# Altium PCB Soldeer Station Final.PcbDoc
Units mm, origin at the board's own origin, x right, y up, seen from the top; angles counter-clockwise.
Board outline 97.79 x 129.54 mm, 2 copper layers (Top Layer, Bottom Layer); 81 components, 77 nets, 280 pads, 28 vias.
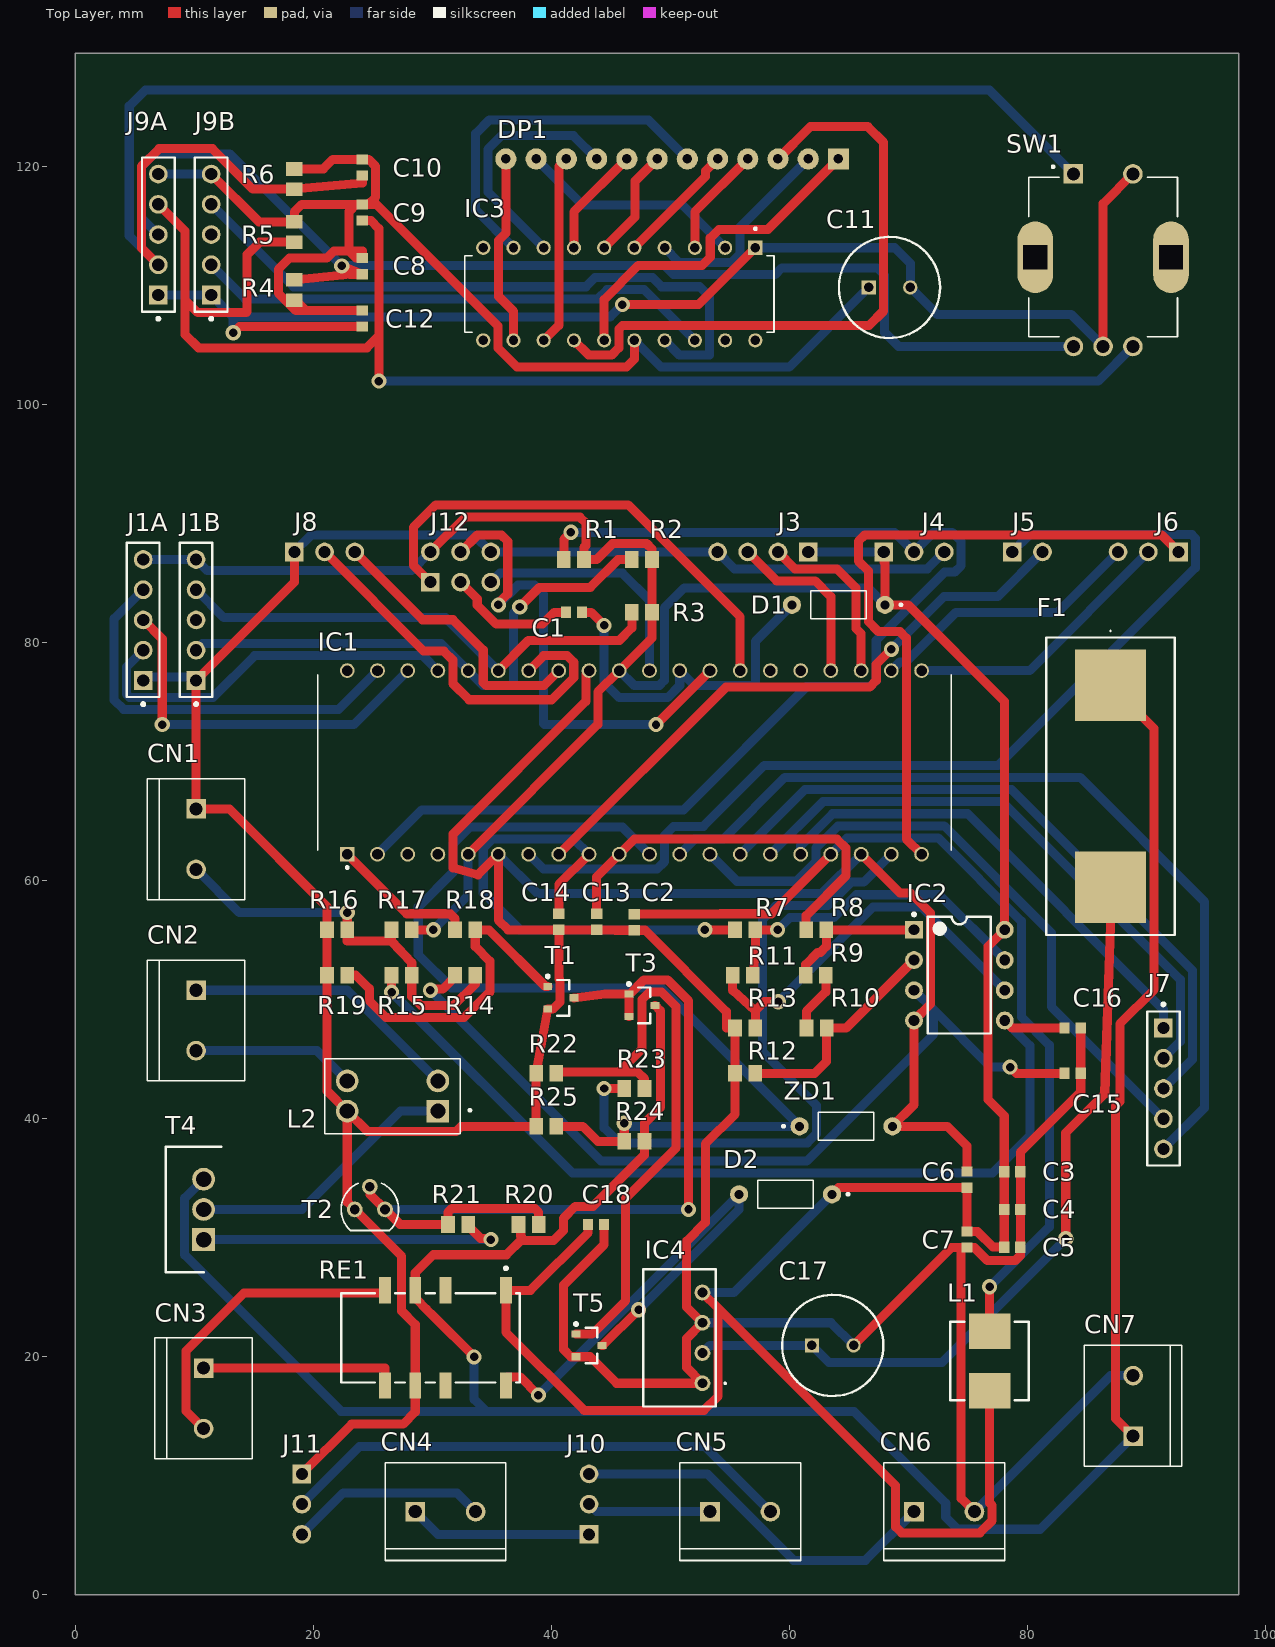
[diagram p0: Top Layer view]
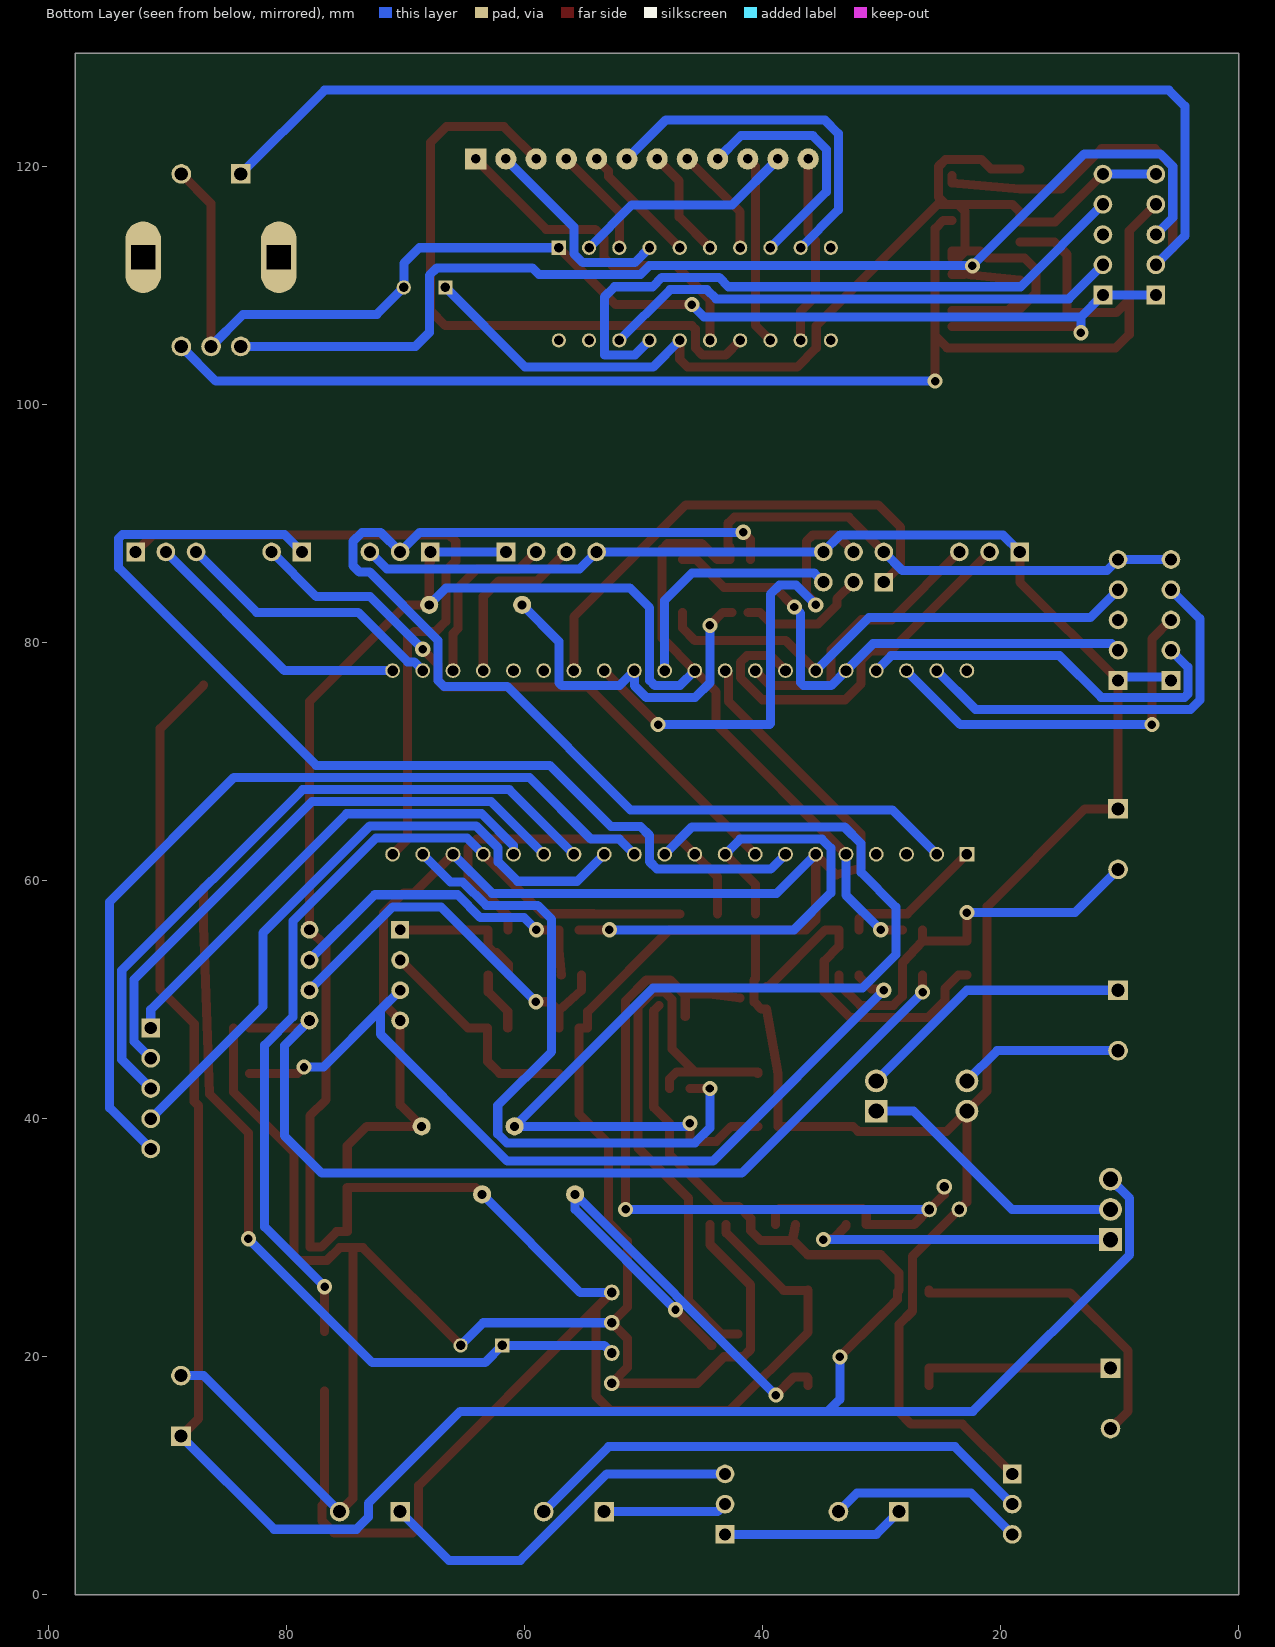
[diagram p1: Bottom Layer view, seen from below]

## Layer stack, top to bottom
Top Solder: solder mask 0.0102, Solder Resist, Dk 3.5
Top Layer: signal copper 0.0356
Dielectric 1: dielectric 0.32, FR-4, Dk 4.8
Bottom Layer: signal copper 0.0356
Bottom Solder: solder mask 0.0102, Solder Resist, Dk 3.5

## Board outline
0,0 97.79,0 97.79,129.54 0,129.54

## Design rules (kind name [scope] priority, off if disabled: settings)
Clearance [All] p1: gap=0.254 ignorepadtopadclearanceinfootprint=FALSE except(0: Arc-Hole Track-Hole SMDPad-Hole THPad-Hole Via-Hole Fill-Hole Poly-Hole Region-Hole Text-Hole)
HoleSize [All] p1: absolutevalues=TRUE maxlimit=2.921 minlimit=0.025 maxpercent=80.000 minpercent=20.000
PolygonConnect [All] p1: connectstyle=Relief reliefconductorwidth=0.254 reliefentries=4 polygonreliefangle="90 Angle" airgapwidth=0.254
RoutingVias [All] p1: holewidth=0.711 width=1.27 viastyle="Through Hole" minholewidth=0.711 minwidth=1.27 maxholewidth=0.711 maxwidth=1.27
SolderMaskExpansion [All] p1: expansion=0.102 istentingtop=FALSE
Width [All] p1: maxlimit=0.762 minlimit=0.254 preferedwidth=0.762 minimp=50.000000 maximp=50.000000 favimp=50.000000
29 further rules are at their usual default settings.

## Classes and differential pairs
component class Verwarmingselement: CN2 L2 R18 R19 R20 R21 T1 T2 T3 T4
component class Tempmeting: C13 C14 C15 C16 CN1 IC2 R7 R8 R9 R10 R11 R12 R13 R14 R15 R16 R17
component class "Soldeer Station": C1 C2 C3 C4 C5 C6 C7 D1 IC1 J1A J1B J3 J4 J5 J6 J7 J8 J12 L1 R1 R2 R3
component class Display: C8 C9 C10 C11 C12 DP1 IC3 J9A J9B R4 R5 R6 SW1
component class Batterij: C17 C18 CN3 CN4 CN5 CN6 CN7 D2 D? F1 IC4 J10 J11 R22 R23 R24 R25 RE1 T5 ZD1

## Components (designator, comment, footprint, x,y, rotation, side; value= is the part's Value field where it differs from the comment)
C1 "C0402C104K4RACTU" Capacitor 41.91,82.55 r0 top
C2 "C0402C104K4RACTU" Capacitor 46.99,56.515 r90 top
C3 "C0402C104K4RACTU" Capacitor 78.74,35.56 r180 top
C4 "C0402C104K4RACTU" Capacitor 78.74,32.385 r0 top
C5 "C0402C104K4RACTU" Capacitor 78.74,29.21 r0 top
C6 "10uf 50V" Capacitor 74.93,34.885 r270 top
C7 "10n" Capacitor 74.93,29.845 r90 top
C8 "C0402C104K4RACTU" Capacitor 24.13,111.64 r90 top
C9 "C0402C104K4RACTU" Capacitor 24.13,116.165 r90 top
C10 "C0402C104K4RACTU" Capacitor 24.13,119.935 r90 top
C11 "100uf 25v" "100uf 25v" 66.675,109.855 r0 top
C12 "C0402C104K4RACTU" Capacitor 24.13,107.235 r90 top
C13 "10n" Capacitor 43.815,56.555 r90 top
C14 "10n" Capacitor 40.64,56.555 r90 top
C15 "10n" Capacitor 83.82,43.815 r180 top
C16 "10n" Capacitor 83.82,47.625 r180 top
C17 "100uf 25v" "100uf 25v" 61.905,20.955 r0 top
C18 "C0402C104K4RACTU" Capacitor 43.775,31.115 r180 top
CN1 "" "K1,K2,K3,K8 Printkroonsteen" 10.16,63.5 r270 top
CN2 "" "K1,K2,K3,K8 Printkroonsteen" 10.16,48.26 r270 top
CN3 "K1,K2,K3,K8 Printkroonsteen" "K1,K2,K3,K8 Printkroonsteen" 10.795,16.51 r270 top
CN4 "Lader" "K1,K2,K3,K8 Printkroonsteen" 31.115,6.985 r0 top
CN5 "Batterij 20V 2Ah- 4Ah" "K1,K2,K3,K8 Printkroonsteen" 55.88,6.985 r0 top
CN6 "K1,K2,K3,K8 Printkroonsteen" "K1,K2,K3,K8 Printkroonsteen" 73.025,6.985 r0 top
CN7 "K1,K2,K3,K8 Printkroonsteen" "K1,K2,K3,K8 Printkroonsteen" 88.9,15.875 r90 top
D1 "1N4148" 1N4007 64.135,83.185 r180 top
D2 "1N4007" 1N4007 59.69,33.655 r180 top
DP1 "Display" DIP12 64.135,120.65 r180 top
F1 "" 65800201009 86.995,67.945 r270 top
IC1 "ATMEGA4809-PF" ATmega4809-PF 46.99,69.945 r90 top
IC2 "MCP6002-E/P" MCP6002 74.295,52.07 r0 top
IC3 "TM1637" TM1637 45.72,109.3 r270 top
IC4 "CRE1S2405SC" CRE1(SC) 53.835,21.59 r90 top
J1A "K9 5Pinheader" "K9 5Pinheader" 5.715,81.915 r90 top
J1B "K9 5Pinheader" "K9 5Pinheader" 10.16,81.915 r90 top
J3 "UART2" "K6 4Pinheader" 57.785,87.63 r180 top
J4 "K4,7,10 3Pinheader" "K4,7,10 3Pinheader" 70.485,87.63 r0 top
J5 "K5 2Pinheader" "K5 2Pinheader" 80.01,87.63 r0 top
J6 "" "K4,7,10 3Pinheader" 90.17,87.63 r180 top
J7 "K9 5Pinheader" "K9 5Pinheader" 91.44,42.545 r270 top
J8 "UART0" "K4,7,10 3Pinheader" 20.955,87.63 r0 top
J9A "K9 5Pinheader" "K9 5Pinheader" 6.985,114.3 r90 top
J9B "K9 5Pinheader" "K9 5Pinheader" 11.43,114.3 r90 top
J10 "K4,7,10 3Pinheader" "K4,7,10 3Pinheader" 43.18,7.62 r90 top
J11 "K4,7,10 3Pinheader" "K4,7,10 3Pinheader" 19.05,7.62 r270 top
J12 "K11 6Pinheader" "K11 6Pinheader" 29.845,85.09 r0 top
L1 "" Smoorspoel 76.835,19.645 r270 top
L2 "Spoel" CM2545x171B-10 26.67,41.91 r180 top
R1 "4k7" Resistor 41.91,86.995 r0 top (schematic designator R160)
R2 "4k7" Resistor 47.625,86.995 r0 top
R3 "4k7" Resistor 47.625,82.55 r0 top
R4 "10k" Resistor 18.415,109.64 r270 top
R5 "10k" Resistor 18.415,114.515 r90 top
R6 "10k" Resistor 18.415,118.96 r90 top
R7 "5k6" Resistor 56.3,55.88 r0 top
R8 "5k6" Resistor 62.269,55.88 r0 top
R9 "18K" Resistor 62.23,52.07 r0 top
R10 "18K" Resistor 62.294,47.625 r0 top
R11 "18k" Resistor 56.095,52.07 r180 top
R12 "100E" Resistor 56.3,43.815 r0 top
R13 "100Ω" Resistor 56.3,47.625 r0 top
R14 "5K6" Resistor 32.766,52.07 r0 top
R15 "5k6" Resistor 27.432,52.07 r0 top
R16 "10M" Resistor 22.01,55.88 r0 top
R17 "1M" Resistor 27.432,55.88 r0 top
R18 "10K" Resistor 32.766,55.88 r0 top
R19 "4k7" Resistor 22.01,52.07 r0 top
R20 "4k7" Resistor 38.1,31.115 r180 top
R21 "100Ω" Resistor 32.17,31.115 r0 top
R22 "4.7k" Resistor 39.585,43.815 r180 top
R23 "10k" Resistor 46.99,42.545 r180 top
R24 "6,8k" Resistor 46.99,38.1 r180 top
R25 "10k" Resistor 39.585,39.37 r180 top
RE1 "G6S-2F-DC5" G6S-2F-DC5 29.845,21.59 r180 top
SW1 "PEC11R-4225F-S0024" "PEC11 S1" 86.375,112.395 r0 top
T1 "BC847B" bc847b 40.81,50.165 r0 top
T2 "BC857C" BC557C 24.765,32.385 r0 top
T3 "BC847B" bc847b 47.625,49.53 r0 top
T4 "IRF9Z34NPBF" TO254P469X1042X1967-3P 10.795,29.845 r90 top
T5 "BC847B" BC847B 43.18,20.955 r0 top
ZD1 "5V1" 1N4007 64.77,39.37 r0 top

## Footprints (in the part's own frame and the unit in brackets; to place one, negate y for a bottom-side part, rotate by r counter-clockwise, add the part's x,y. Pads: shape width x height; smd on the part's side, far side on the other; paste and mask are expansions set on the pad)
1N4007 [mil]
  round 60 hole 30: 1(-153.72,0) 2(153.72,0)
  silkscreen extent -211,-46 91,46, body extent -216,-53 216,53, height 106
"100uf 25v" [mm]
  rect 1.2x1.2 hole 0.8: 1(0,0)
  round 1.2 hole 0.8: 2(3.5,0)
  silkscreen extent -2.5,-4.25 6,4.25, body extent -2.49,-4.25 6,4.25, height 13
65800201009 [mm]
  rect 6x6 smd: 1(-8.5,0) 2(8.5,0)
  silkscreen extent -13.1,-5.4 12.5,5.4, body extent -11.45,-4.8 11.45,4.8, height 12.1
ATmega4809-PF [mm]
  rect 1.24x1.24 hole 0.89: 1(-7.715,24.13)
  round 1.24 hole 0.89: 2(-7.715,21.59) 3(-7.715,19.05) 4(-7.715,16.51) 5(-7.715,13.97) 6(-7.715,11.43) 7(-7.715,8.89) 9(-7.715,3.81) 10(-7.715,1.27) 11(-7.715,-1.27) 12(-7.715,-3.81) 13(-7.715,-6.35) 14(-7.715,-8.89) 15(-7.715,-11.43) 16(-7.715,-13.97) 17(-7.715,-16.51) 18(-7.715,-19.05) 19(-7.715,-21.59) 20(-7.715,-24.13) 21(7.715,-24.13) 22(7.715,-21.59) 23(7.715,-19.05) 24(7.715,-16.51) 25(7.715,-13.97) 26(7.715,-11.43) 27(7.715,-8.89) 28(7.715,-6.35) 29(7.715,-3.81) 30(7.715,-1.27) 31(7.715,1.27) 32(7.715,3.81) 33(7.715,6.35) 34(7.715,8.89) 35(7.715,11.43) 36(7.715,13.97) 37(7.715,16.51) 38(7.715,19.05) 39(7.715,21.59) 40(7.715,24.13) qqqq(-7.715,6.35)
  silkscreen extent -8.94,-26.61 7.37,26.61, body extent -8.26,-26.14 8.26,26.14, height 2.03
BC557C [mil]
  round 52 hole 32: B(0,75) C(-50,0) E(50,0)
  silkscreen extent -95,-70 95,87, body extent -94,-60 94,94, height 305
bc847b [mm] "SOT23, 3-Leads, Body 2.9x1.3 mm, Pitch 0.95 mm, IPC High Density"
  rect 0.75x0.6 smd: 1(-1.1,0.95) 2(-1.1,-0.95) 3(1.1,0)
  silkscreen extent -1.22,-1.5 0.7,1.92, body extent -0.7,-1.5 0.7,1.5, height 1.1
BC847B [mm] "SOT23, 3-Leads, Body 2.9x1.3 mm, Pitch 0.95 mm, IPC High Density"
  rect 0.75x0.6 smd: 1(-1.1,0.95) 2(-1.1,-0.95) 3(1.1,0)
  silkscreen extent -1.22,-1.5 0.7,1.92, body extent -0.7,-1.5 0.7,1.5, height 1.1
Capacitor [mm] "Chip Capacitor, 2-Leads, Body 1.60x0.80mm, IPC High Density"
  rect 0.85x0.95 smd: 1(-0.675,0) 2(0.675,0)
  body extent -0.85,-0.45 0.85,0.45, height 0.9
CM2545x171B-10 [mm]
  rect 1.905x1.905 hole 1.27: 1(-3.81,1.27)
  round 1.905 hole 1.27: 2(-3.81,-1.27) 3(3.81,-1.27) 4(3.81,1.27)
  silkscreen extent -6.6,-3.15 5.69,3.15, body extent -5.69,-3.15 5.69,3.15, height 9.5
CRE1(SC) [mm]
  round 1.33 hole 0.83: 1(-3.81,1.13) 2(-1.27,1.13) 3(1.27,1.13) 4(3.81,1.13)
  silkscreen extent -5.76,-0.83 5.76,6.1
DIP12 [mil]
  rect 70x70 hole 31.5: 1(0,0)
  round 70 hole 31.5: 2(100,0) 3(200,0) 4(300,0) 5(400,0) 6(500,0) 7(600,0) 8(700,0) 9(800,0) 10(900,0) 11(1000,0) 12(1100,0)
G6S-2F-DC5 [mm]
  rect 1x2.2 smd paste+0 mask+0: 1(-6.35,-4) 3(-1.27,-4) 4(1.27,-4) 5(3.81,-4) 8(3.81,4) 9(1.27,4) 10(-1.27,4) 12(-6.35,4)
  silkscreen extent -7.5,-5.97 7.5,3.75, body extent -7.6,-5.2 7.6,5.2, height 0.25
"K1,K2,K3,K8 Printkroonsteen" [mm]
  rect 1.65x1.65 / inner round 1.65 / far side rect 1.65x1.65 hole 1.1: 1(-2.54,0)
  round 1.65 hole 1.1: 2(2.54,0)
  silkscreen extent -5.08,-4.1 5.08,4.1, body extent -5.68,-4.1 5.08,4.1, height 10
"K4,7,10 3Pinheader" [mm]
  rect 1.57x1.57 hole 1.02 paste-2539.97 mask+0: 1(-2.54,0)
  round 1.57 hole 1.02 paste-2539.97 mask+0: 2(0,0) 3(2.54,0)
"K5 2Pinheader" [mm]
  rect 1.57x1.57 hole 1.02 paste-2539.97 mask+0: 1(-1.27,0)
  round 1.57 hole 1.02 paste-2539.97 mask+0: 2(1.27,0)
"K6 4Pinheader" [mm]
  rect 1.57x1.57 hole 1.02 paste-2539.97 mask+0: 1(-3.81,0)
  round 1.57 hole 1.02 paste-2539.97 mask+0: 2(-1.27,0) 3(1.27,0) 4(3.81,0)
"K9 5Pinheader" [mm]
  rect 1.57x1.57 hole 1.02 paste-2539.97 mask+0: 1(-5.08,0)
  round 1.57 hole 1.02 paste-2539.97 mask+0: 2(-2.54,0) 3(0,0) 4(2.54,0) 5(5.08,0)
  silkscreen extent -7.2,-1.37 6.48,1.37, body extent -6.58,-1.47 6.58,1.47, height 0.25
"K11 6Pinheader" [mm]
  rect 1.57x1.57 hole 1.02 paste-2539.97 mask+0: 1(0,0)
  round 1.57 hole 1.02 paste-2539.97 mask+0: 2(0,2.54) 3(2.54,0) 4(2.54,2.54) 5(5.08,0) 6(5.08,2.54)
MCP6002 [mm] "8-Pin Plastic Dual In-Line Package (PDIP)"
  rect 1.5x1.5 hole 0.9: 1(-3.81,3.81)
  round 1.5 hole 0.9: 2(-3.81,1.27) 3(-3.81,-1.27) 4(-3.81,-3.81) 5(3.81,-3.81) 6(3.81,-1.27) 7(3.81,1.27) 8(3.81,3.81)
  silkscreen extent -3.93,-4.9 2.65,5.23, body extent -3.55,-4.9 3.55,4.9, height 4.32
"PEC11 S1" [mm]
  round 1.65 hole 1.1: 1(-2.5,-7.5) 2(2.5,-7.5) 3(0,-7.5) 5(2.5,7)
  rect 1.65x1.65 hole 1.1: 4(-2.5,7)
  oval 3x6 hole 2 square: S1(-5.7,0) S2(5.7,0)
  silkscreen extent -6.25,-6.7 6.25,7.7
Resistor [mm] "Chip Resistor, 2-Leads, Body 2,00x1,25mm, IPC Medium Density"
  rect 1.15x1.4 smd: 1(-0.85,0) 2(0.85,0)
  body extent -1.08,-0.7 1.07,0.7, height 0.6
Smoorspoel [mm]
  rect 3x3.5 smd paste+0 mask+0: 1(-2.5,0) 2(2.5,0)
  silkscreen extent -3.3,-3.3 3.3,3.3, body extent -4.1,-3.4 4.1,3.4, height 0.25
TM1637 [mm]
  rect 1.19x1.19 hole 0.79: 1(-3.89,11.43)
  round 1.19 hole 0.79: 2(-3.89,8.89) 3(-3.89,6.35) 4(-3.89,3.81) 5(-3.89,1.27) 6(-3.89,-1.27) 7(-3.89,-3.81) 8(-3.89,-6.35) 9(-3.89,-8.89) 10(-3.89,-11.43) 11(3.89,-11.43) 12(3.89,-8.89) 13(3.89,-6.35) 14(3.89,-3.81) 15(3.89,-1.27) 16(3.89,1.27) 17(3.89,3.81) 18(3.89,6.35) 19(3.89,8.89) 20(3.89,11.43)
  silkscreen extent -5.58,-13 3.2,13, body extent -4.03,-13 4.03,13, height 4.31
TO254P469X1042X1967-3P [mm]
  rect 1.92x1.92 hole 1.28: 1(0,0)
  round 1.92 hole 1.28: 2(2.54,0) 3(5.08,0)
  silkscreen extent -2.73,-1.49 7.81,3.2, body extent -2.67,-1.5 7.75,3.19, height 18.84

## Part data
C1 C2 C3 C4 C5 C8 C9 C10 C12 C18: library part Condensator, Manufacturer=Kemet, Part Number=C0402C104K4RACTU
C6 C7 C13 C14 C15 C16: library part Condensator, Manufacturer=Kemet, Part Number=C0402C104K4RACTU
C11 C17: "Capacitor Polarised", Arrow Part Number=ESMG250ELL101MF11D, Manufacturer_Name=Chemi-Con, Mouser Part Number=661-ESMG250ELL101MF, Arrow Price/Stock=https://www.arrow.com/en/products/esmg250ell101mf11d/united-chemi-con?region=nac, Datasheet Link=http://www.chemi-con.co.jp/cgi-bin/CAT_DB/SEARCH/cat_db_al.cgi?e=e&j=p&pdfname=smg, Height=12.5mm, Manufacturer_Part_Number=ESMG250ELL101MF11D, Mouser Price/Stock=https://www.mouser.co.uk/ProductDetail/Chemi-Con/ESMG250ELL101MF11D?qs=46VwSHQt9xX2tXRf6ZkiIw%3D%3D
CN1 CN2 CN4 CN5: library part "K1,K2,K3,K8 Printkroonsteen", Package=None, Availability="In Stock", Check_prices=https://www.snapeda.com/parts/282837-2/TE+Connectivity+AMP+Connectors/view-part/?ref=eda, MF="TE Connectivity", MP=282837-2, Price=None, Purchase-URL=https://pricing.snapeda.com/search/part/282837-2/?ref=eda, SnapEDA_Link=https://www.snapeda.com/parts/282837-2/TE+Connectivity+AMP+Connectors/view-part/?ref=snap
CN3 CN6 CN7: Package=None, Availability="In Stock", Check_prices=https://www.snapeda.com/parts/282837-2/TE+Connectivity+AMP+Connectors/view-part/?ref=eda, MF="TE Connectivity", MP=282837-2, Price=None, Purchase-URL=https://pricing.snapeda.com/search/part/282837-2/?ref=eda, SnapEDA_Link=https://www.snapeda.com/parts/282837-2/TE+Connectivity+AMP+Connectors/view-part/?ref=snap
D1: library part 1N4148,133, "Diode", Manufacturer_Name=Nexperia, Mouser Part Number=771-1N4148,133, Arrow Part Number=1N4148,133, Arrow Price/Stock=https://www.arrow.com/en/products/1n4148133/nxp-semiconductors, Datasheet Link=https://assets.nexperia.com/documents/data-sheet/1N4148_1N4448.pdf, Manufacturer_Part_Number=1N4148,133, Mouser Price/Stock=https://www.mouser.co.uk/ProductDetail/Nexperia/1N4148133?qs=elmhQ6eFu7hy8ApvpFxPZg%3D%3D
D2: "Diode", Arrow Part Number=1N4007-E3/73, Manufacturer_Name=Vishay, Mouser Part Number=625-1N4007-E3/73, Arrow Price/Stock=https://www.arrow.com/en/products/1n4007-e373/vishay?region=europe, Datasheet Link=https://mouser.componentsearchengine.com/Datasheets/2/1N4007-E3_73.pdf, Manufacturer_Part_Number=1N4007-E3/73, Mouser Price/Stock=https://www.mouser.co.uk/ProductDetail/Vishay-General-Semiconductor/1N4007-E3-73?qs=N4vtoAxH%2FSqT3Ng3e4K0Gw%3D%3D
F1: library part 65800201009, "Hardware", Manufacturer_Name=LITTELFUSE, Datasheet Link=https://www.littelfuse.com/media?resourcetype=datasheets&itemid=8563b5b9-30c3-4ebb-8e89-3cabf2bd05b5&filename=littelfuse-fuse-block-658-datasheet, Height=13.2mm, Manufacturer_Part_Number=65800201009
IC2: library part MCP6002, "None", Case/Package=PDIP, Input Bias Current=1pA, Input Offset Voltage (Vos)=4.5mV, Max Operating Temperature=125°C, Max Supply Voltage=6V, Min Operating Temperature=-40°C, Min Supply Voltage=1.8V, Nominal Supply Current=100uA, Operating Supply Voltage=5.5V, Output Current=23mA, Package Quantity=60, Power Supply Rejection Ratio (PSRR)=86dB, Voltage Gain=112dB, Amplifier Type="GENERAL PURPOSE", Bandwidth=1MHz, Common Mode Rejection Ratio=60dB, Gain Bandwidth Product=1MHz, Height=3.3mm, Input Offset Voltage-Max=4.5mV, Lead Free="Lead Free", Length=9.27mm, Mount="Through Hole", Number of Amplifiers=2, Number of Channels=2, Number of Circuits=2, Number of Elements=2, Number of Pins=8, Operating Supply Current=100uA, Output Current per Channel=23mA, Packaging=Rail/Tube, Radiation Hardening=No, REACH SVHC="No SVHC", RoHS Compliant=Yes, Slew Rate=0.6V/µs, Slew Rate-Nom=0.6V/µs, Supply Current=100uA, Technology=CMOS, Unity Gain Bandwidth Product=1MHz, Width=6.35mm
IC3: Package=Package, Availability="Not in stock", Check_prices=https://www.snapeda.com/parts/TM1637/Titan+Micro+Electronics/view-part/?ref=eda, MF="Titan Micro Electronics", MP=TM1637, Price=None, SnapEDA_Link=https://www.snapeda.com/parts/TM1637/Titan+Micro+Electronics/view-part/?ref=snap
IC4: "Undefined or Miscellaneous", Manufacturer_Name="Murata Electronics", Mouser Part Number=580-CRE1S2405SC, Arrow Part Number=CRE1S2405SC, Arrow Price/Stock=https://www.arrow.com/en/products/cre1s2405sc/murata-power-solutions, Datasheet Link=http://power.murata.com/datasheet?/data/power/ncl/kdc_cre1.pdf, Manufacturer_Part_Number=CRE1S2405SC, Mouser Price/Stock=https://www.mouser.co.uk/ProductDetail/Murata-Power-Solutions/CRE1S2405SC?qs=pFP7BvE1PmwUsyXD%252BXcXxQ%3D%3D
J1A J1B J4 J5 J7 J9A J9B J10 J11 J12: Color=Black, Contact Resistance=20mΩ, Current Rating=4A, Flammability Rating="UL94 V-0", Max Operating Temperature=75°C, Max Voltage Rating (DC)=250.25kV, Min Operating Temperature=0°C, Voltage Rating=250V, Connector Type="Male Pin", Contact Material=Brass, Contact Mating Length=6.096mm, Contact Plating=Tin, Gender=Male, Glow Wire Compliant=Non-compliant, Height=2.29mm, Housing Color=Black, Housing Material=Thermoplastic, Lead Free="Lead Free", Lead Pitch=2.54mm, Length=12.7mm, Mount="Through Hole", NexarPartId=278173, Number of Circuits=5, Number of Contacts=5, Number of Positions=5, Number of Rows=1, Orientation=Vertical, Packaging=Bulk, Pitch=2.54mm, Radiation Hardening=No, REACH SVHC=Unknown, RoHS=Compliant, Schedule B=8536694040|8536694040|8536694040|8536694040|8536694040|8536694040|8536694040|8536694040|8536694040|8536694040|8536694040|8536694040|8536694040|8536694040|8536694040|8536694040|8536694040|8536694040|8536694040|8536694040|8536694040|8536694040|8536694040|85, Termination=Solder, Voltage Rating (DC)=250V, Width=2.49mm
J3: library part "K6 4Pinheader", Color=Black, Contact Resistance=20mΩ, Current Rating=4A, Flammability Rating="UL94 V-0", Max Operating Temperature=75°C, Max Voltage Rating (DC)=250.25kV, Min Operating Temperature=0°C, Voltage Rating=250V, Connector Type="Male Pin", Contact Material=Brass, Contact Mating Length=6.096mm, Contact Plating=Tin, Gender=Male, Glow Wire Compliant=Non-compliant, Height=2.29mm, Housing Color=Black, Housing Material=Thermoplastic, Lead Free="Lead Free", Lead Pitch=2.54mm, Length=12.7mm, Mount="Through Hole", NexarPartId=278173, Number of Circuits=5, Number of Contacts=5, Number of Positions=5, Number of Rows=1, Orientation=Vertical, Packaging=Bulk, Pitch=2.54mm, Radiation Hardening=No, REACH SVHC=Unknown, RoHS=Compliant, Schedule B=8536694040|8536694040|8536694040|8536694040|8536694040|8536694040|8536694040|8536694040|8536694040|8536694040|8536694040|8536694040|8536694040|8536694040|8536694040|8536694040|8536694040|8536694040|8536694040|8536694040|8536694040|8536694040|8536694040|85, Termination=Solder, Voltage Rating (DC)=250V, Width=2.49mm
J6 J8: library part "K4,7,10 3Pinheader", Color=Black, Contact Resistance=20mΩ, Current Rating=4A, Flammability Rating="UL94 V-0", Max Operating Temperature=75°C, Max Voltage Rating (DC)=250.25kV, Min Operating Temperature=0°C, Voltage Rating=250V, Connector Type="Male Pin", Contact Material=Brass, Contact Mating Length=6.096mm, Contact Plating=Tin, Gender=Male, Glow Wire Compliant=Non-compliant, Height=2.29mm, Housing Color=Black, Housing Material=Thermoplastic, Lead Free="Lead Free", Lead Pitch=2.54mm, Length=12.7mm, Mount="Through Hole", NexarPartId=278173, Number of Circuits=5, Number of Contacts=5, Number of Positions=5, Number of Rows=1, Orientation=Vertical, Packaging=Bulk, Pitch=2.54mm, Radiation Hardening=No, REACH SVHC=Unknown, RoHS=Compliant, Schedule B=8536694040|8536694040|8536694040|8536694040|8536694040|8536694040|8536694040|8536694040|8536694040|8536694040|8536694040|8536694040|8536694040|8536694040|8536694040|8536694040|8536694040|8536694040|8536694040|8536694040|8536694040|8536694040|8536694040|85, Termination=Solder, Voltage Rating (DC)=250V, Width=2.49mm
L1: library part "Smoorspoel 10 µH", Case Code (Imperial)=2525, Case Code (Metric)=6363, Current Rating=1.6A, DC Resistance (DCR)=36mR, Inductance=10uH, Inductance Tolerance=20%, Max Operating Temperature=80°C, Min Operating Temperature=-25°C, Package Quantity=350, Resistor Type=Wirewound, Self Resonant Frequency=20MHz, Test Frequency=1MHz, Case/Package=2525, Core Material=Ferrite, DC Current=1.6A, Depth=6.6mm, Height=4.7mm, Height - Seated (Max)=0.197inch, Lead Free="Lead Free", Length=0.248inch, Max DC Current=1.6A, Military Standard=Not, Mount="Surface Mount", Packaging="Tape and Reel", Radiation Hardening=No, REACH SVHC="No SVHC", Shielding=Shielded, Termination=SMD/SMT, Tolerance=20%, Weight=0.025045oz, Width=6.3mm
L2: library part "Common Mode Smoorspoel", Current=700mA, DC Resistance (DCR)=100mR, Inductance=10mH, Insulation Resistance=100MR, Max Operating Temperature=120°C, Min Operating Temperature=-25°C, Package Quantity=1260, Voltage Rating (DC)=300V, Current Rating=700mA, DC Current=700mA, Depth=16mm, Height=17.5mm, Lead Diameter=0.9mm, Lead Free="Lead Free", Lead Pitch=13mm, Lead/Base Style=Pin, Length=18mm, Max DC Current=700mA, Military Standard=Not, Mount="Through Hole", Number of Lines=2, Orientation=Vertical, Packaging=Bulk, Radiation Hardening=No, REACH SVHC="No SVHC", Shielding=Unshielded, Termination=Radial, Width=0.63inch
R1 R2 R3 R4 R5 R6 R7 R8 R9 R10 R11 R12 R13 R14 R15 R16 R17 R18 R19 R20 R21 R22 R23 R24 R25: library part Resistor, Manufacturer="Vishay Dale", Part Number=CRCW08050000Z0EA
RE1: Ambient Temperature Range High=+85°C, Ambient Temperature Range Low=-40°C, Coil Current=28.1mA, Coil Power=140mW, Coil Resistance=178Ω, Coil Voltage=5V, Current Rating=2A, Manufacturer=Omron, Temperature="-40°C to +85°C", Automotive=No, Category=Relay, Coil Type=Non-Latching, ComponentLink2Description=Datasheet, ComponentLink2URL=https://omronfs.omron.com/en_US/ecb/products/pdf/en-g6s.pdf, Device Class L1=Electromechanical, Device Class L2=Relays, Device Class L3="Signal Relays", Digikey Description="RELAY TELECOM DPDT 2A 5VDC", Height=9.4mm, Lead Free=Yes, Manufacturer Part Number=G6S-2F-DC5, Mouser Description="Electromechanical Relay 5VDC 178Ohm 2A DPDT (14.8x9.2x9.2)mm SMD Signal Relay", Number of Contacts=2, Octopart=https://octopart.com/g6s-2f-dc5-omron-85236, Package=G6S-2F-DC5, RoHS=TRUE, Standoff Height=0.35mm, Switching Current=2A, Temperature Range High=+85°C, Temperature Range Low=-40°C, Throw Configuration=DPDT
SW1: "Undefined or Miscellaneous", Manufacturer_Name=Bourns, Mouser Part Number=652-PEC11R-4225F-S24, Arrow Part Number=PEC11R-4225F-S0024, Arrow Price/Stock=https://www.arrow.com/en/products/pec11r-4225f-s0024/bourns?region=nac, Datasheet Link=https://componentsearchengine.com/Datasheets/1/PEC11R-4225F-S0024.pdf, Manufacturer_Part_Number=PEC11R-4225F-S0024, Mouser Price/Stock=https://www.mouser.co.uk/ProductDetail/Bourns/PEC11R-4225F-S0024?qs=Zq5ylnUbLm4N6UNkPX3pkQ%3D%3D
T1 T3: "NPN Silicon AF Transistor, 45 V VCEO, 100 mA IC, SOT23, Reel, Green", Manufacturer=Infineon, ComponentLink1Description="Manufacturer URL", ComponentLink1URL=http://www.infineon.com/, ComponentLink2Description=Datasheet, ComponentLink2URL=http://www.infineon.com/dgdl/bc847series_bc848series_bc849series_bc850series.pdf?folderId=db3a304314dca389011541d30fa21656&fileId=db3a304314dca389011541d4630a1657, ComponentLink3Description="Package Specification", ComponentLink3URL=http://www.infineon.com/dgdl/SOT23-Package_Overview.pdf?folderId=db3a30431936bc4b0119532290053c66&fileId=db3a30431936bc4b0119533468123c85, fT (typ)="250Â MHz", Green=TRUE, IBM (max)="200Â mA", IC (max)="100Â mA", ICBO (max)="15Â nA", ICM (max)="200Â mA", Mounting Technology="Surface Mount", PackageDescription="3-Pin Small Outline Transistor Package, 1.3 x 2.9 mm Body, 0.95 mm Pitch", PackageReference=SOT23, PackageVersion=Apr-08, Packing=Reel, PartNumber=BC847B, Polarity=NPN, Ptot (max)="330Â mW", VCBO (max)="50Â V", VCEO (max)="45Â V", VEBO (max)="6Â V"
T2: library part BC557C, Package="E-PKG AXIAL-LEADED-2 ON Semiconductor", Availability="In Stock", Check_prices=https://www.snapeda.com/parts/BC557/Onsemi/view-part/?ref=eda, MF=ON, MP=BC557, Price=None, SnapEDA_Link=https://www.snapeda.com/parts/BC557/Onsemi/view-part/?ref=snap
T4: "MOSFET (P-Channel)", Manufacturer_Name=Infineon, Mouser Part Number=942-IRF9Z34NPBF, Arrow Part Number=IRF9Z34NPBF, Arrow Price/Stock=https://www.arrow.com/en/products/irf9z34npbf/infineon-technologies-ag?region=europe, Datasheet Link=https://www.infineon.com/dgdl/irf9z34npbf.pdf?fileId=5546d462533600a40153561220af1ddd, Height=4.69mm, Manufacturer_Part_Number=IRF9Z34NPBF, Mouser Price/Stock=https://www.mouser.co.uk/ProductDetail/Infineon-Technologies/IRF9Z34NPBF?qs=9%252BKlkBgLFf16a%2FvlD%252BMCtQ%3D%3D
T5: "NPN Silicon AF Transistor", Manufacturer=Infineon, ComponentLink1Description="Manufacturer URL", ComponentLink1URL=http://www.infineon.com/, ComponentLink2Description=Datasheet, ComponentLink2URL=http://www.infineon.com/dgdl/bc847series_bc848series_bc849series_bc850series.pdf?folderId=db3a304314dca389011541d30fa21656&fileId=db3a304314dca389011541d4630a1657, ComponentLink3Description="Package Specification", ComponentLink3URL=http://www.infineon.com/dgdl/SOT23-Package_Overview.pdf?folderId=db3a30431936bc4b0119532290053c66&fileId=db3a30431936bc4b0119533468123c85, fT (typ)="250Â MHz", Green=TRUE, IBM (max)="200Â mA", IC (max)="100Â mA", ICBO (max)="15Â nA", ICM (max)="200Â mA", Mounting Technology="Surface Mount", PackageDescription="3-Pin Small Outline Transistor Package, 1.3 x 2.9 mm Body, 0.95 mm Pitch", PackageReference=SOT23, PackageVersion=Apr-08, Packing=Reel, PartNumber=BC847B, Polarity=NPN, Ptot (max)="330Â mW", VCBO (max)="50Â V", VCEO (max)="45Â V", VEBO (max)="6Â V"
ZD1: library part Zenerdiode, "BZM55B5V1-TR", Case/Package=SMD/SMT, Max Operating Temperature=175°C, Max Power Dissipation=500mW, Max Reverse Leakage Current=100nA, Min Operating Temperature=-65°C, Package Quantity=12500, Test Current=5mA, Voltage Tolerance=2%, Zener Voltage=5.1V, Contact Plating=Tin, Element Configuration=Single, ESD Protection=No, Impedance=60R, Mount="Surface Mount", Number of Pins=2, Packaging="Tape and Reel", Power Dissipation=500mW, Radiation Hardening=No, RoHS Compliant=Yes, Series=-
IC1: RoHS Compliant=Yes

## Via types
v1: diameter 1.27, hole 0.711, Top Layer to Bottom Layer, 28 vias

## Nets (pads, with @x,y where several pads share a name; then routed paths per layer and width w, separated by ;. In a path a pad name is that pad's centre, name@x,y a point inside that pad or via, vN(x,y) a via of type N, cw(c..) or ccw(c..) an arc to the next point about the centre after c; other vN are vias at no path point)
+5: C3.2 C4.1 C5.1 C6.2 C7.2 C18.2 D1.1 D2.1 IC1.5 IC1.31 IC2.8 IC4.4 J1A.5 J1B.5 J3.1 J4.1 J12.2 L1.2 R1.2 R2.2 R3.2 R17.2 RE1.1 | length 313.3
  Top Layer w0.762: R17.2 v1(30.099,55.88) ; J12.2 32.778,90.563 42.406,90.563 42.926,90.043 42.926,88.189 42.76,88.023 R1.2 43.815,86.995 45.161,88.341 48.006,88.341 48.475,87.872 R2.2 R3.2 48.475,80.415 IC1.31 43.927,75.868 43.927,73.137 IC1.5 ; RE1.1 RE1.1@36.195,25.578 ; C18.2 43.1,30.425 38.252,25.578 RE1.1@36.195,25.578 ; IC4.4 54.026,24.079 ; D2.1 64.149,34.21 C6.2 C7.2 75.819,30.52 77.129,29.21 C5.1 C4.1 C3.2 78.065,40.248 76.708,41.605 76.708,54.483 IC2.8 78.105,75.06 69.98,83.185 D1.1 68.039,86.689 67.945,86.784 J4.1 ; L1.2 76.835,7.722 77.038,7.518 77.038,6.223 76.022,5.207 69.444,5.207 68.936,5.715 68.936,9.169 54.026,24.079 ; RE1.1@36.195,25.578 36.195,22.073 42.774,15.494 52.832,15.494 54.026,16.688 54.026,24.079
  Bottom Layer w0.762: J1A.5 J1B.5 11.1,86.055 28.27,86.055 J12.2 ; v1(30.099,55.88) 33.02,58.801 IC1.5 ; IC1.31 46.975,76.405 49.085,76.405 49.515,76.835 49.515,82.931 51.191,84.607 66.617,84.607 D1.1 ; IC4.4 55.339,25.4 D2.1 ; J3.1 J4.1
GND: C2.1 C3.1 C4.2 C5.2 C6.1 C7.1 C13.1 C14.1 C15.1 C16.1 C17.2 C18.1 CN1.1 CN6.2 CN7.2 IC1.6 IC1.18 IC1.32 IC2.4 IC4.1 IC4.3 J1A.1 J1B.1 J3.4 J4.3 J8.1 J11.1 J12.6 L2.4 R12.1 R13.1 R16.1 R19.1 R22.2 R25.2 RE1.9 T1.2 T2.C T5.2 ZD1.2 | length 469.1
  Top Layer w0.762: J8.1 18.415,85.09 J1B.1 CN1.1 12.954,66.04 21.16,57.834 R16.1 R19.1 21.16,42.34 L2.4 ; J11.1 23.241,14.351 27.559,14.351 28.575,15.367 RE1.9 28.575,22.708 27.432,23.851 27.432,28.448 T2.C 22.86,33.02 L2.4 ; IC1.32 42.911,77.392 42.911,75.084 31.75,63.923 31.75,61.087 33.833,60.503 IC1.6 35.56,56.693 36.373,55.88 C14.1 ; C18.1 44.45,29.439 41.046,26.035 41.046,20.615 41.656,20.005 T5.2 43.273,20.005 45.498,17.78 IC4.1 51.384,19.101 51.384,21.539 IC4.3 51.384,24.181 51.384,29.718 52.959,31.293 52.959,37.895 55.45,40.386 R12.1 R13.1 54.724,47.625 54.724,49.009 47.894,55.84 C2.1 45.404,55.84 45.364,55.88 C13.1 C14.1 ; C17.2 73.62,29.17 74.447,29.17 ; IC1.18 69.291,58.979 70.18,58.979 71.882,57.277 71.882,49.657 IC2.4 70.485,41.181 ZD1.2 73.279,39.37 74.93,37.719 C6.1 ; CN6.2 74.447,8.103 74.447,29.17 ; C16.1 C15.1 84.495,42.266 79.415,37.186 C3.1 C4.2 C5.2 79.415,28.513 78.994,28.092 76.643,28.092 75.565,29.17 C7.1 74.447,29.17 ; L2.4 24.562,38.938 32.004,38.938 32.436,39.37 R25.2 R22.2 T1.2 40.132,49.215 40.742,49.825 40.742,51.638 40.64,51.74 C14.1
  Bottom Layer w0.762: J1A.1 6.02,77.14 9.855,77.14 J1B.1 ; J8.1 19.837,89.052 33.503,89.052 J12.6 J3.4 55.397,86.208 71.603,86.208 J4.3 ; IC1.6 38.847,58.943 62.753,58.943 IC1.18 ; IC4.3 63.5,22.86 C17.2 ; CN6.2 86.995,18.415 CN7.2
NetC1_1: C1.1 J12.3 | length 11
  Top Layer w0.762: J12.3 33.787,83.688 33.787,83.162 35.39,81.559 39.263,81.559 40.254,82.55 C1.1
NetC1_2: C1.2 D1.2 IC1.29 | length 30.4
  Top Layer w0.762: C1.2 43.358,82.55 v1(44.45,81.458)
  Bottom Layer w0.762: v1(44.45,81.458) 44.45,76.657 45.718,75.389 49.784,75.389 50.8,76.405 IC1.29 52.057,76.403 56.896,76.403 57.15,76.657 57.15,80.104 D1.2
NetC2_2: C2.2 IC1.17 L1.1 | length 75.6
  Top Layer w0.762: C2.2 54.193,57.19 54.229,57.226 58.496,57.226 IC1.17 ; L1.1 v1(76.835,25.883)
  Bottom Layer w0.762: IC1.17 64.872,63.602 72.509,63.602 79.499,56.612 79.499,48.555 81.864,46.19 81.864,30.912 v1(76.835,25.883)
NetC8_1: C8.1 J9A.3 R4.1 SW1.1 | length 105.5
  Top Layer w0.762: R4.1 22.48,110.902 23.096,110.965 ; v1@22.407,111.662 C8.1 ; 23.096,110.965 v1(22.403,111.658) C8.1 ; 23.096,110.965 C8.1
  Bottom Layer w0.762: J9A.3 5.563,115.722 5.563,120.015 6.629,121.082 12.987,121.082 v1@22.407,111.662 ; v1(22.403,111.658) v1@22.407,111.662 ; SW1.1 69.197,104.895 68.021,106.07 68.021,110.871 67.386,111.506 59.385,111.506 58.811,110.931 50.292,110.931 49.514,111.709 22.454,111.709 v1@22.407,111.662
NetC8_2: C8.2 C9.2 C10.2 C11.1 C12.2 IC3.16 J9A.5 J9B.5 R4.2 R5.2 R6.2 | length 110.5
  Top Layer w0.762: J9B.5 15.445,115.365 R5.2 18.415,116.205 19.05,116.84 23.622,116.84 ; R4.2 18.542,108.79 19.422,107.91 ; R6.2 20.853,119.81 21.653,120.61 C10.2 24.653,120.61 25.248,120.015 25.248,117.45 24.638,116.84 ; C12.2 19.422,107.91 ; IC3.16 46.99,103.833 46.321,103.164 37.131,103.164 35.52,104.775 35.52,106.629 25.309,116.84 24.638,116.84 ; 19.422,107.91 18.542,107.91 17.069,109.383 17.069,111.379 18.005,112.315 21.14,112.315 21.754,112.928 23.012,112.928 ; 23.012,112.928 24.13,112.928 C8.2 23.6,112.315 23.012,112.903 23.012,112.928 ; 23.012,112.928 23.012,116.23 23.622,116.84 ; 23.622,116.84 C9.2 24.638,116.84
  Bottom Layer w0.762: J9A.5 J9B.5 ; IC3.16 49.236,103.164 59.984,103.164 C11.1
NetC9_1: C9.1 J9A.4 R5.1 SW1.2 | length 123
  Top Layer w0.762: J9A.4 9.22,114.605 9.22,108.839 ; R5.1 15.494,113.665 14.453,112.624 14.453,107.823 14.376,107.747 10.312,107.747 9.22,108.839 ; C9.1 24.841,115.49 25.527,114.804 25.527,113.386 25.527,105.791 ; v1(25.527,101.981) 25.527,105.791 ; 9.22,108.839 9.22,105.918 10.363,104.775 24.511,104.775 25.527,105.791
  Bottom Layer w0.762: v1(25.527,101.981) 85.961,101.981 SW1.2
NetC10_1: C10.1 J9A.2 R6.1 SW1.4 | length 127.3
  Top Layer w0.762: J9A.2 5.563,113.182 5.563,120.015 7.061,121.514 11.532,121.514 14.935,118.11 R6.1 24.13,118.618 C10.1
  Bottom Layer w0.762: J9A.2 4.547,114.198 4.547,125.095 5.893,126.441 76.829,126.441 SW1.4
NetC11_2: C11.2 C12.1 IC3.1 J9A.1 J9B.1 SW1.3 SW1.5 | length 115.1
  Top Layer w0.762: v1(13.284,106.045) 13.799,106.56 C12.1 ; v1(45.974,108.407) 52.367,108.407 IC3.1 ; SW1.3 86.375,116.895 SW1.5
  Bottom Layer w0.762: J9A.1 J9B.1 13.284,107.366 ; v1(13.284,106.045) 13.284,107.366 ; v1(45.974,108.407) 44.958,107.391 13.284,107.366 ; IC3.1 68.86,113.19 70.175,111.875 C11.2 72.436,107.594 83.676,107.594 SW1.3
NetC13_2: C13.2 IC1.10 R8.1 | length 33.9
  Top Layer w0.762: C13.2 43.815,60.325 IC1.10 46.99,63.5 64.008,63.5 64.77,62.738 64.77,60.427 61.419,57.076 R8.1
NetC14_2: C14.2 IC1.9 R7.1 | length 42
  Top Layer w0.762: C14.2 40.64,59.69 IC1.9 ; v1(52.908,55.88) R7.1
  Bottom Layer w0.762: IC1.9 41.91,63.5 35.052,63.5 34.29,62.738 34.29,58.979 37.389,55.88 v1(52.908,55.88)
NetC15_2: C15.2 IC2.3 R14.1 | length 72.9
  Top Layer w0.762: v1(29.845,50.8) 29.942,50.897 30.868,50.897 31.916,51.945 R14.1 ; v1(78.562,44.348) 79.096,43.815 C15.2
  Bottom Layer w0.762: v1(29.845,50.8) 44.196,36.449 61.468,36.449 72.136,47.117 72.136,49.149 ; IC2.3 72.136,49.149 ; v1(78.562,44.348) 76.937,44.348 72.136,49.149
NetC16_2: C16.2 IC2.5 R15.1 | length 78.5
  Top Layer w0.762: v1(26.582,50.648) R15.1 ; IC2.5 78.74,47.625 C16.2
  Bottom Layer w0.762: v1(26.582,50.648) 41.797,35.433 77.064,35.433 80.213,38.583 80.213,46.152 IC2.5
NetC17_1: C17.1 F1.2 IC4.2 | length 66.6
  Top Layer w0.762: v1(83.236,29.921) 83.236,38.811 86.512,42.088 86.995,56.261 F1.2
  Bottom Layer w0.762: IC4.2 53.34,20.955 C17.1 63.353,19.507 72.822,19.507 v1(83.236,29.921)
NetCN1_2: CN1.2 R14.2 R15.2 R16.2 R17.1 | length 33.7
  Top Layer w0.762: v1(22.86,57.328) R16.2 22.86,54.927 26.582,54.927 ; R17.1 26.582,54.927 ; R14.2 33.616,51.32 31.826,49.53 29.041,49.53 28.282,50.289 R15.2 28.282,53.111 26.582,54.927
  Bottom Layer w0.762: CN1.2 13.792,57.328 v1(22.86,57.328)
NetCN2_1: CN2.1 L2.2 | length 23.5
  Bottom Layer w0.762: CN2.1 22.86,50.8 L2.2
NetCN2_2: CN2.2 L2.3 | length 13.8
  Bottom Layer w0.762: CN2.2 20.32,45.72 L2.3
NetCN3_1: CN3.1 RE1.8 | length 16.7
  Top Layer w0.762: CN3.1 26.035,19.05 RE1.8
NetCN3_2: CN3.2 RE1.5 | length 26.1
  Top Layer w0.762: CN3.2 9.322,15.443 9.322,20.498 14.199,25.375 26.035,25.375 RE1.5
NetCN4_1: CN4.1 J10.1 | length 15.4
  Bottom Layer w0.762: CN4.1 30.48,5.08 J10.1
NetCN4_2: CN4.2 J11.3 | length 16.7
  Bottom Layer w0.762: J11.3 22.53,8.56 32.08,8.56 CN4.2
NetCN5_1: CN5.1 J10.2 | length 10.4
  Bottom Layer w0.762: J10.2 43.815,6.985 CN5.1
NetCN5_2: CN5.2 J11.2 | length 43.6
  Bottom Layer w0.762: J11.2 23.876,12.446 52.959,12.446 CN5.2
NetCN6_1: CN6.1 J10.3 | length 32
  Bottom Layer w0.762: J10.3 53.111,10.16 60.376,2.896 66.396,2.896 CN6.1
NetCN7_1: CN7.1 F1.1 R20.2 R24.1 RE1.4 T3.3 T4.3 | length 220.9
  Top Layer w0.762: v1(33.528,19.99) 30.13,23.388 29.506,24.011 28.694,24.824 28.694,25.471 RE1.4 28.575,27.051 30.099,28.575 36.234,28.575 37.504,29.845 ; T3.3 49.174,49.081 49.174,40.97 47.84,39.636 R24.1 47.84,36.969 43.51,32.639 42.037,32.639 41.021,31.623 41.021,30.607 40.183,29.769 37.58,29.769 ; F1.1 90.653,72.787 90.653,50.851 87.782,47.981 87.782,41.453 87.427,41.097 87.427,14.808 CN7.1 ; 37.504,29.845 37.44,30.162 37.313,30.797 R20.2 37.58,29.769 ; 37.504,29.845 37.58,29.769
  Bottom Layer w0.762: T4.3 9.195,33.325 9.195,28.575 22.352,15.418 34.544,15.418 ; v1(33.528,19.99) 33.528,16.434 34.544,15.418 ; CN7.1 81.077,5.512 74.168,5.512 73.152,6.528 73.152,7.696 65.43,15.418 34.544,15.418
NetD2_2: D2.2 RE1.12 T5.3 | length 45.4
  Top Layer w0.762: RE1.12 36.195,18.19 36.314,18.309 36.759,18.309 36.76,18.311 37.392,18.311 v1(38.916,16.786) ; T5.3 44.348,20.955 v1(47.346,23.952)
  Bottom Layer w0.762: v1(38.916,16.786) D2.2 55.786,32.392 v1(47.346,23.952)
NetDP1_1: DP1.1 IC3.15 | length 28.9
  Top Layer w0.762: IC3.15 44.45,108.839 47.32,111.709 52.68,111.709 53.365,112.395 53.365,113.995 54.102,114.732 58.217,114.732 DP1.1
NetDP1_2: DP1.2 IC3.4 | length 17.5
  Bottom Layer w0.762: IC3.4 50.773,111.947 55.128,111.947 55.88,112.7 55.88,114.935 DP1.2
NetDP1_3: DP1.3 IC3.14 | length 53.7
  Top Layer w0.762: IC3.14 43.14,104.18 45.085,104.18 45.68,104.775 45.68,106.346 45.974,106.64 66.686,106.64 67.92,107.874 67.92,122.047 66.599,123.368 61.773,123.368 DP1.3
NetDP1_4: DP1.4 IC3.3 | length 9.3
  Top Layer w0.762: IC3.3 52.07,116.205 DP1.4
NetDP1_5: DP1.5 IC3.5 | length 10.4
  Top Layer w0.762: IC3.5 52.959,119.159 52.959,119.634 DP1.5
NetDP1_6: DP1.6 IC3.9 | length 30.5
  Bottom Layer w0.762: IC3.9 33.655,116.365 33.655,122.784 34.798,123.927 48.158,123.927 DP1.6
NetDP1_7: DP1.7 IC3.6 | length 9.3
  Top Layer w0.762: IC3.6 47.045,115.785 47.045,118.8 DP1.7
NetDP1_8: DP1.8 IC3.7 | length 9.3
  Top Layer w0.762: IC3.7 41.91,116.205 DP1.8
NetDP1_9: DP1.9 IC3.8 | length 20.6
  Bottom Layer w0.762: IC3.8 34.671,117.889 34.671,121.463 35.814,122.606 41.859,122.606 DP1.9
NetDP1_10: DP1.10 IC3.13 | length 16
  Top Layer w0.762: IC3.13 40.64,106.68 40.64,120.015 DP1.10
NetDP1_11: DP1.11 IC3.2 | length 19
  Bottom Layer w0.762: DP1.11 42.596,116.789 51.011,116.789 IC3.2
NetDP1_12: DP1.12 IC3.12 | length 16
  Top Layer w0.762: DP1.12 36.195,114.427 35.585,113.817 35.585,109.093 36.83,107.848 IC3.12
NetIC1_1: IC1.1 R18.1 | length 12.2
  Top Layer w0.762: IC1.1 27.864,57.226 31.496,57.226 31.916,56.806 R18.1
NetIC1_2: IC1.2 J4.2 R1.1 | length 100.1
  Top Layer w0.762: R1.1 41.06,88.685 v1(41.656,89.281)
  Bottom Layer w0.762: IC1.2 29.134,65.964 51.13,65.964 61.493,76.327 66.802,76.327 67.31,76.835 67.31,80.2 73.055,85.945 73.905,85.945 74.447,86.487 74.447,88.519 73.685,89.281 72.136,89.281 J4.2 68.834,89.281 v1(41.656,89.281)
NetIC1_7: IC1.7 J5.1 | length 86.9
  Bottom Layer w0.762: IC1.7 39.355,60.975 48.885,60.975 49.53,61.62 49.53,63.805 50.292,64.567 52.781,64.567 57.912,69.698 77.546,69.698 94.132,86.284 94.132,88.773 93.828,89.078 80.188,89.078 J5.1
NetIC1_8: IC1.qqqq J5.2 | length 51.9
  Top Layer w0.762: IC1.qqqq 54.686,76.276 66.751,76.276 67.31,76.835 67.31,78.181 v1(68.58,79.451)
  Bottom Layer w0.762: v1(68.58,79.451) 73,83.871 77.521,83.871 J5.2
NetIC1_11: IC1.11 R24.2 R25.1 ZD1.1 | length 89.2
  Top Layer w0.762: R25.1 42.647,39.37 43.917,38.1 R24.2 v1(46.14,39.624)
  Bottom Layer w0.762: v1(46.14,39.624) 46.394,39.37 ZD1.1 49.232,51.003 31.623,51.003 28.829,53.797 28.829,57.785 31.75,60.706 31.75,63.119 33.147,64.516 45.974,64.516 IC1.11
NetIC1_12: IC1.12 J7.5 | length 73.3
  Bottom Layer w0.762: IC1.12 52.07,63.5 54.447,63.5 59.628,68.682 84.443,68.682 94.892,58.233 94.892,40.917 J7.5
NetIC1_13: IC1.13 J7.4 | length 55.5
  Bottom Layer w0.762: IC1.13 55.611,59.959 60.609,59.959 62.245,61.595 62.245,62.753 64.11,64.618 73.016,64.618 82.022,55.611 82.022,49.423 J7.4
NetIC1_14: IC1.14 J7.3 | length 57.5
  Bottom Layer w0.762: IC1.14 61.316,67.666 78.68,67.666 93.876,52.469 93.876,44.981 J7.3
NetIC1_15: IC1.15 J7.2 | length 49.7
  Bottom Layer w0.762: IC1.15 62.84,66.65 77.902,66.65 92.86,51.691 92.86,46.505 J7.2
NetIC1_16: IC1.16 J7.1 | length 40.7
  Bottom Layer w0.762: IC1.16 60.96,62.949 63.644,65.634 74.984,65.634 91.44,49.178 J7.1
NetIC1_19: IC1.19 R23.2 | length 56.6
  Top Layer w0.762: v1(44.45,42.545) R23.2
  Bottom Layer w0.762: v1(44.45,42.545) 44.45,39.243 45.72,37.973 61.519,37.973 62.281,38.735 62.281,41.123 57.76,45.644 57.76,56.759 58.928,57.927 63.261,57.927 65.227,59.893 66.243,59.893 IC1.19
NetIC1_20: IC1.20 J6.1 | length 57.3
  Top Layer w0.762: IC1.20 69.85,63.5 69.85,80.391 69.294,80.947 67.483,80.947 66.642,81.788 66.642,86.037 65.811,86.868 65.811,88.519 66.345,89.052 91.288,89.052 J6.1
NetIC1_21: IC1.21 J6.2 | length 23.2
  Bottom Layer w0.762: IC1.21 80.2,77.66 J6.2
NetIC1_22: IC1.22 J6.3 | length 23.2
  Bottom Layer w0.762: IC1.22 69.306,78.387 69.85,78.387 74.013,82.55 82.55,82.55 J6.3
NetIC1_23: IC1.23 J3.2 | length 14.9
  Top Layer w0.762: J3.2 60.475,86.21 64.008,86.21 65.626,84.591 65.626,81.186 66.04,80.772 IC1.23
NetIC1_24: IC1.24 J3.3 | length 14.8
  Top Layer w0.762: J3.3 58.951,85.194 62.177,85.194 63.5,83.871 IC1.24
NetIC1_27: IC1.27 J12.1 | length 41.8
  Top Layer w0.762: J12.1 28.423,86.512 28.423,89.687 30.314,91.579 46.47,91.579 55.88,82.169 IC1.27
NetIC1_28: IC1.28 J12.4 | length 42
  Top Layer w0.762: J12.4 33.807,89.052 35.814,89.052 36.347,88.519 36.347,84.11 35.56,83.322 v1(35.56,83.185) ; v1(48.806,73.127) IC1.28
  Bottom Layer w0.762: v1(35.56,83.185) 37.211,84.836 38.608,84.836 39.37,84.074 39.37,73.203 39.446,73.127 v1(48.806,73.127)
NetIC1_30: IC1.30 J12.5 | length 20.5
  Bottom Layer w0.762: J12.5 35.687,85.852 45.974,85.852 48.26,83.566 IC1.30
NetIC1_33: IC1.33 J8.3 | length 23.9
  Top Layer w0.762: J8.3 29.192,81.933 31.732,81.933 34.29,79.375 34.29,76.657 34.544,76.403 39.383,76.403 IC1.33
NetIC1_34: IC1.34 J8.2 | length 33.9
  Top Layer w0.762: J8.2 29.286,79.299 30.988,79.299 31.75,78.537 31.75,76.556 33.096,75.209 40.041,75.209 41.895,77.063 41.895,78.359 41.336,78.918 39.357,78.918 IC1.34
NetIC1_35: IC1.35 J1B.4 R3.1 | length 42.2
  Top Layer w0.762: IC1.35 38.087,80.188 45.72,80.188 46.775,81.243 R3.1
  Bottom Layer w0.762: J1B.4 12.497,82.118 31.102,82.118 IC1.35
NetIC1_36: IC1.36 J1B.2 R2.1 | length 46.1
  Top Layer w0.762: v1(37.361,83.005) 39.014,84.658 43.282,84.658 45.618,86.995 R2.1
  Bottom Layer w0.762: J1B.2 10.717,79.932 30.749,79.932 IC1.36 34.277,76.403 36.576,76.403 36.83,76.657 36.83,82.474 v1(37.361,83.005)
NetIC1_37: IC1.37 J1A.2 | length 32.5
  Bottom Layer w0.762: J1A.2 4.295,77.955 4.295,75.692 4.572,75.415 11.58,75.415 15.081,78.916 29.225,78.916 IC1.37
NetIC1_38: IC1.38 J1A.3 | length 32
  Top Layer w0.762: J1A.3 7.315,80.315 v1(7.315,73.127)
  Bottom Layer w0.762: v1(7.315,73.127) 23.406,73.127 IC1.38
NetIC1_39: IC1.39 J1A.4 | length 34.1
  Bottom Layer w0.762: J1A.4 3.279,82.019 3.279,75.184 4.064,74.399 22.138,74.399 IC1.39
NetIC2_1: IC2.1 R8.2 R9.1 | length 12
  Top Layer w0.762: R9.1 61.38,52.959 62.396,53.975 62.611,53.975 63.119,54.483 R8.2 IC2.1
NetIC2_2: IC2.2 R10.2 R12.2 | length 18.9
  Top Layer w0.762: R12.2 62.128,43.815 63.144,44.831 R10.2 64.77,47.625 IC2.2
NetIC2_6: IC2.6 R11.2 R13.2 | length 32.8
  Top Layer w0.762: R11.2 55.245,50.8 57.15,49.073 ; R13.2 57.15,49.073 ; v1(59.08,49.835) 57.912,49.835 57.15,49.073
  Bottom Layer w0.762: v1(59.08,49.835) 67.056,57.81 71.095,57.81 IC2.6
NetIC2_7: IC2.7 R7.2 R11.1 | length 28.3
  Top Layer w0.762: R11.1 57.15,54.18 R7.2 v1(59.03,55.88)
  Bottom Layer w0.762: v1(59.03,55.88) 60.061,56.911 63.739,56.911 65.654,58.826 72.619,58.826 IC2.7
NetIC3_17: IC3.17 J9B.4 | length 54.9
  Bottom Layer w0.762: J9B.4 18.355,109.915 42.91,109.915 43.688,110.693 48.498,110.693 49.276,109.915 52.467,109.915 53.315,109.068 53.315,104.205 53.289,104.18 50.76,104.18 IC3.17
NetIC3_18: IC3.18 J9B.2 | length 43.9
  Bottom Layer w0.762: J9B.2 14.291,108.899 43.926,108.899 44.704,109.677 47.803,109.677 IC3.18
NetL2_1: L2.1 T4.2 | length 23.1
  Bottom Layer w0.762: T4.2 19.075,32.385 27.33,40.64 L2.1
NetR9_2: R9.2 R10.1 | length 5.1
  Top Layer w0.762: R10.1 61.444,49.022 63.08,50.658 R9.2
NetR18_2: R18.2 R19.2 T1.1 | length 28.7
  Top Layer w0.762: R19.2 23.571,52.07 24.714,50.927 24.714,49.911 26.111,48.514 32.69,48.514 34.849,50.673 34.849,53.25 33.616,54.483 R18.2 34.757,55.88 39.522,51.115 T1.1
NetR20_1: R20.1 R21.1 T1.3 T2.B T2.E T3.1 T3.2 | length 74
  Top Layer w0.762: T2.B 24.765,33.655 T2.E 27.305,31.115 R21.1 31.32,32.131 31.65,32.461 38.62,32.461 38.95,32.131 R20.1 ; T1.3 44.536,50.48 T3.1 ; T3.2 T3.1 ; v1(51.537,32.385) 51.537,49.911 49.784,51.664 47.793,51.664 46.609,50.48 T3.1
  Bottom Layer w0.762: T2.E v1(51.537,32.385)
NetR21_2: R21.2 T4.1 | length 26.6
  Top Layer w0.762: R21.2 33.02,30.99 34.068,29.942 34.828,29.942 v1(34.925,29.845)
  Bottom Layer w0.762: T4.1 v1(34.925,29.845)
NetR22_1: R22.1 R23.1 T5.1 | length 50.9
  Top Layer w0.762: R22.1 40.435,43.942 45.72,43.942 ; T5.1 43.444,21.905 46.253,24.714 46.253,33.325 50.495,37.567 50.495,49.428 49.276,50.648 48.26,50.648 47.625,50.013 47.625,45.847 45.72,43.942 ; R23.1 47.84,43.346 47.244,43.942 45.72,43.942
pads on no net: IC1.3 IC1.4 IC1.25 IC1.26 IC1.40 IC3.10 IC3.11 IC3.19 IC3.20 J1B.3 J9B.3 RE1.3 RE1.10 SW1.S1 SW1.S2